# EAGLE board Fejlesztokeszlet1 (EAGLE 6.1)
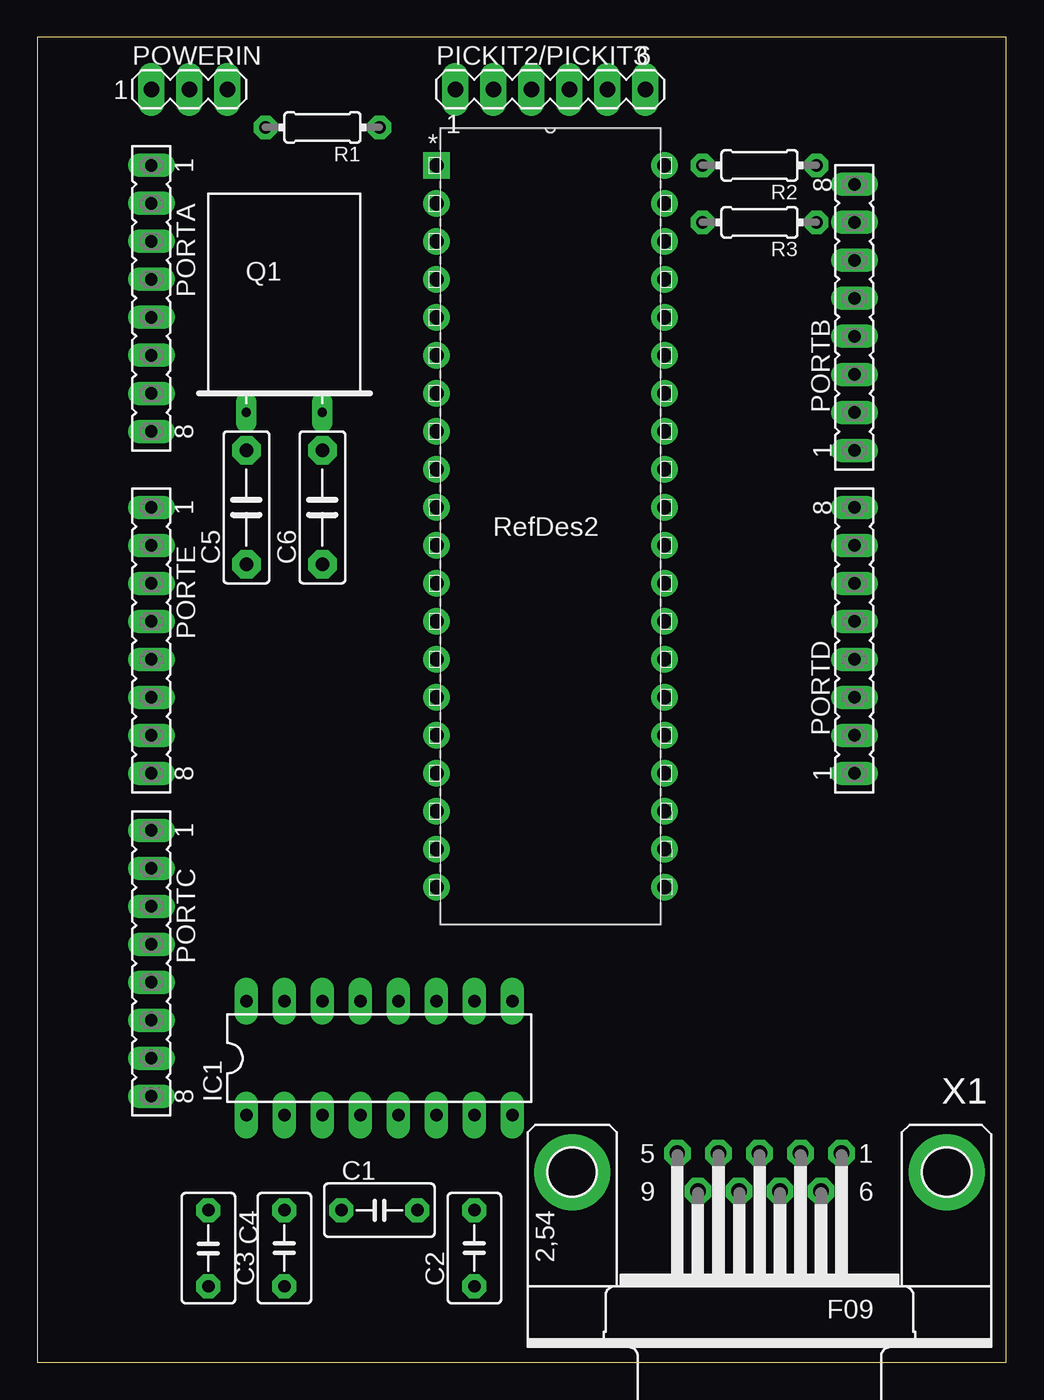
[diagram p0: board, top side]
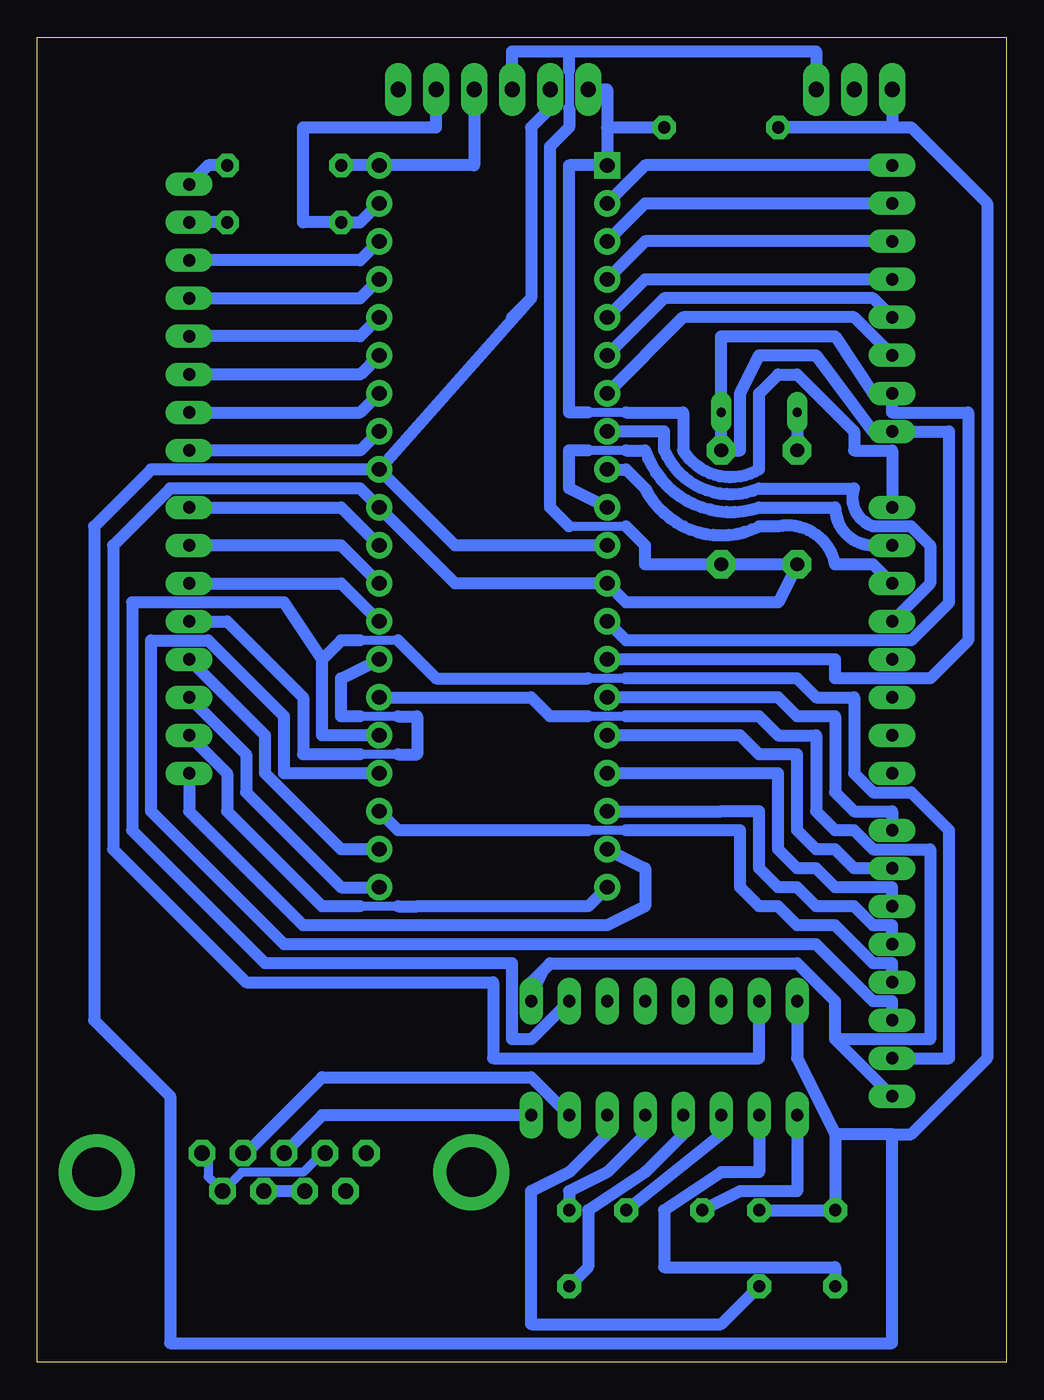
[diagram p1: board, bottom side, seen from below]

Size 64.75 x 88.57 mm. Coordinates in mm from the lower left corner, seen from the top.
Outline: 0,0 64.75,0 64.75,88.57 0,88.57 0,0
Copper layers (1*16): Top 0.035mm / dielectric 1.5mm / Bottom 0.035mm
Design rules: minimum track width 10mil, minimum drill 20mil, track to track 5mil, track to pad 5mil, pad to pad 5mil, via to via 5mil, smd to smd 10mil, copper to edge 20mil, drill to drill 0.5mil, minimum pad ring 15mil, minimum via ring 10mil, stop-mask expansion 0mil, vias tented up to drill 0mil, thermal gap 10mil

## Footprints (pad centres in the part's own frame; a part is rotated, then mirrored left to right if it is on the bottom)
C5B3.5 = drill 0.813 pad 1.6 octagon: 1 -2.54,0; 2 2.54,0
C7.5B3 = drill 0.914 pad 1.905 octagon: 1 -3.81,0; 2 3.81,0
DIL16 = drill 0.813 long: 1 -8.89,-3.81; 2 -6.35,-3.81; 3 -3.81,-3.81; 4 -1.27,-3.81; 5 1.27,-3.81; 6 3.81,-3.81; 7 6.35,-3.81; 8 8.89,-3.81; 9 8.89,3.81; 10 6.35,3.81; 11 3.81,3.81; 12 1.27,3.81; 13 -1.27,3.81; 14 -3.81,3.81; 15 -6.35,3.81; 16 -8.89,3.81
PDIP40_600MC = drill 0.991 square: 1 -15.24,48.26 | drill 0.991: 2 -15.24,45.72; 3 -15.24,43.18; 4 -15.24,40.64; 5 -15.24,38.1; 6 -15.24,35.56; 7 -15.24,33.02; 8 -15.24,30.48; 9 -15.24,27.94; 10 -15.24,25.4; 11 -15.24,22.86; 12 -15.24,20.32; 13 -15.24,17.78; 14 -15.24,15.24; 15 -15.24,12.7; 16 -15.24,10.16; 17 -15.24,7.62; 18 -15.24,5.08; 19 -15.24,2.54; 20 -15.24,0; 21 0,0; 22 0,2.54; 23 0,5.08; 24 0,7.62; 25 0,10.16; 26 0,12.7; 27 0,15.24; 28 0,17.78; 29 0,20.32; 30 0,22.86; 31 0,25.4; 32 0,27.94; 33 0,30.48; 34 0,33.02; 35 0,35.56; 36 0,38.1; 37 0,40.64; 38 0,43.18; 39 0,45.72; 40 0,48.26
MA06-1 = drill 1.016 long: 1 -6.35,0; 2 -3.81,0; 3 -1.27,0; 4 1.27,0; 5 3.81,0; 6 6.35,0
FE08 = drill 0.813 long: 1 -8.89,0; 2 -6.35,0; 3 -3.81,0; 4 -1.27,0; 5 1.27,0; 6 3.81,0; 7 6.35,0; 8 8.89,0
MA03-1 = drill 1.016 long: 1 -2.54,0; 2 0,0; 3 2.54,0
Q = drill 0.61 long: 1 -2.54,-7.62; 2 2.54,-7.62
0204/7 = drill 0.813 octagon: 1 -3.81,0; 2 3.81,0
F09HP = drill 1.016 octagon: 1 -5.486,-1.27; 2 -2.743,-1.27; 3 0,-1.27; 4 2.743,-1.27; 5 5.486,-1.27; 6 -4.115,1.27; 7 -1.372,1.27; 8 1.372,1.27; 9 4.115,1.27 | drill 3.302 pad 5.08: G1 -12.522,0; G2 12.522,0

## Placement (x,y rotation side)
C1  10uF  [C5B3.5]  22.86,10.16 0 top
C2  10uF  [C5B3.5]  29.21,7.62 90 top
C3  10uF  [C5B3.5]  16.51,7.62 90 top
C4  10uF  [C5B3.5]  11.43,7.62 270 top
C5  22pf  [C7.5B3]  13.97,57.15 90 top
C6  22pf  [C7.5B3]  19.05,57.15 90 top
IC1  MAX232  [DIL16]  22.86,20.32 0 top
PIC16F887  PIC16F887-X/P  [PDIP40_600MC]  41.91,31.75 0 top
PICKIT2/PICKIT3  [MA06-1]  34.29,85.09 0 top
PORTA  [FE08]  7.62,71.12 270 top
PORTB  [FE08]  54.61,69.85 90 top
PORTC  [FE08]  7.62,26.67 270 top
PORTD  [FE08]  54.61,48.26 90 top
PORTE  [FE08]  7.62,48.26 270 top
POWERIN  [MA03-1]  10.16,85.09 0 top
Q1  16Mhz  [Q]  16.51,71.12 0 top
R1  4k7  [0204/7]  19.05,82.55 180 top
R2  4k7  [0204/7]  48.26,80.01 180 top
R3  4k7  [0204/7]  48.26,76.2 180 top
X1  [F09HP]  48.26,12.7 180 top

## Library data of the parts
C1-C6 = capacitor-wima
IC1 = maxim; MF: MAXIM; MPN: MAX232ACPE+; OC_FARNELL: 9723773; OC_NEWARK: 68K4544
PIC16F887 = PIC16F887
PICKIT2/PICKIT3 POWERIN = con-lstb; OC_FARNELL: unknown; OC_NEWARK: unknown
PORTA PORTB PORTC PORTD PORTE = con-lsta; OC_FARNELL: unknown; OC_NEWARK: unknown
Q1 = special
R1-R3 = resistor
X1 = con-subd; OC_FARNELL: unknown; OC_NEWARK: unknown

## Nets
GND: X1.5
N$1: PIC16F887.2 PORTA.1
N$2: PIC16F887.3 PORTA.2
N$3: PIC16F887.4 PORTA.3
N$4: PIC16F887.5 PORTA.4
N$5: PIC16F887.6 PORTA.5
N$6: PIC16F887.7 PORTA.6
N$7: C6.2 PIC16F887.13 PIC16F887.14 PORTA.7 PORTA.8 Q1.2
N$9: PIC16F887.20 PORTD.2
N$10: PIC16F887.19 PORTD.1
N$11: PIC16F887.18 PORTC.4
N$12: PIC16F887.17 PORTC.3
N$13: PIC16F887.16 PORTC.2
N$14: PIC16F887.15 PORTC.1
N$15: PIC16F887.21 PORTD.3
N$16: PIC16F887.22 PORTD.4
N$17: PIC16F887.28 PORTD.6
N$18: PIC16F887.27 PORTD.5
N$19: PIC16F887.29 PORTD.7
N$20: PIC16F887.30 PORTD.8
N$21: PIC16F887.23 PORTC.5
N$22: PIC16F887.24 PORTC.6
N$23: IC1.10 PIC16F887.25 PORTC.7
N$24: IC1.9 PIC16F887.26 PORTC.8
N$25: PIC16F887.33 PORTB.1
N$26: PIC16F887.34 PORTB.2
N$27: PIC16F887.35 PORTB.3
N$28: PIC16F887.36 PORTB.4
N$29: PIC16F887.37 PORTB.5
N$30: PIC16F887.38 PORTB.6
N$31: PIC16F887.39 PICKIT2/PICKIT3.5 R3.2
N$32: PIC16F887.40 PICKIT2/PICKIT3.4 R2.2
N$33: PIC16F887.8 PORTE.4
N$34: PIC16F887.9 PORTE.3
N$35: PIC16F887.10 PORTE.2
N$36: PIC16F887.1 PICKIT2/PICKIT3.1 PORTE.1 R1.1
N$37: C5.1 C6.1 IC1.15 PIC16F887.12 PIC16F887.31 PICKIT2/PICKIT3.3 POWERIN.3
N$38: C2.2 IC1.5
N$39: C1.1 IC1.1
N$40: C1.2 IC1.3
N$41: C2.1 IC1.4
N$42: C3.2 C4.1 IC1.16 PIC16F887.11 PIC16F887.32 PICKIT2/PICKIT3.2 POWERIN.1 R1.2
N$43: C3.1 IC1.6
N$44: C4.2 IC1.2
N$45: C5.2 Q1.1
N$46: PORTB.8 R2.1
N$47: X1.1 X1.4 X1.6
N$48: X1.7 X1.8
N$49: IC1.8 X1.3
N$50: IC1.7 X1.2
N$51: PORTB.7 R3.1

## Tracks (layer width: path | path; a pad name or v marks a point on that pad's centre or on a via)
N$1
  Bottom 0.813: PORTA.1 24.13,80.01 PIC16F887.2
N$2
  Bottom 0.813: PIC16F887.3 24.13,77.47 PORTA.2
N$3
  Bottom 0.813: PORTA.3 24.13,74.93 PIC16F887.4
N$4
  Bottom 0.813: PIC16F887.5 24.13,72.39 PORTA.4
N$5
  Bottom 0.813: PIC16F887.6 22.86,71.12 8.89,71.12 PORTA.5
N$6
  Bottom 0.813: PIC16F887.7 21.59,69.85 10.16,69.85 PORTA.6
N$7
  Bottom 0.813: PIC16F887.14 11.43,46.99 11.43,45.72 5.08,45.72 2.54,48.26 2.54,63.5 7.62,63.5 PORTA.7 8.89,64.77 11.43,68.58 19.05,68.58 Q1.2 C6.2 17.78,60.96 17.78,64.77 16.51,67.31 12.7,67.31 8.89,62.23 PORTA.8 3.81,62.23 3.81,50.8 6.35,48.26 25.4,48.26 PIC16F887.13
N$9
  Bottom 0.61: 40.64,30.48 43.18,30.48
  Bottom 0.813: PIC16F887.20 27.94,30.48 39.37,30.48 40.64,30.48 | PORTD.2 52.07,39.37 52.07,36.83 45.72,30.48 43.18,30.48
N$10
  Bottom 0.813: PIC16F887.19 24.13,33.02 24.13,30.48 26.67,29.21 46.99,29.21 54.61,36.83 PORTD.1
N$11
  Bottom 0.813: PORTC.4 7.62,29.21 8.89,29.21 10.16,30.48 12.7,30.48 13.97,31.75 15.24,31.75 16.51,33.02 16.51,36.83 19.05,36.83 PIC16F887.18
N$12
  Bottom 0.813: PORTC.3 7.62,31.75 11.43,31.75 12.7,33.02 13.97,33.02 15.24,34.29 15.24,39.37 PIC16F887.17
N$13
  Bottom 0.406: PIC16F887.16 21.59,41.91
  Bottom 0.813: PIC16F887.16 17.78,41.91 16.51,40.64 13.97,40.64 13.97,35.56 12.7,34.29 11.43,34.29 10.16,33.02 PORTC.2
N$14
  Bottom 0.406: PIC16F887.15 20.32,44.45
  Bottom 0.813: PIC16F887.15 15.24,44.45 13.97,43.18 11.43,43.18 11.43,38.1 10.16,36.83 7.62,36.83 PORTC.1
N$15
  Bottom 0.813: PORTD.3 50.8,40.64 50.8,38.1 44.45,31.75 PIC16F887.21
N$16
  Bottom 0.813: PIC16F887.22 44.45,34.29 49.53,39.37 49.53,41.91 PORTD.4
N$17
  Bottom 0.813: PORTD.6 44.45,52.07 PIC16F887.28
N$18
  Bottom 0.61: 40.64,43.18 43.18,43.18 | 40.64,40.64 43.18,40.64
  Bottom 0.813: PIC16F887.27 44.45,45.72 44.45,43.18 43.18,43.18 | PORTD.5 52.07,49.53 46.99,44.45 46.99,40.64 43.18,40.64 | 40.64,43.18 39.37,43.18 39.37,40.64 40.64,40.64
N$19
  Bottom 0.813: PIC16F887.29 44.45,54.61 PORTD.7
N$20
  Bottom 0.813: PIC16F887.30 43.18,55.88 44.45,57.15 PORTD.8
N$21
  Bottom 0.61: 25.4,35.56 27.94,35.56
  Bottom 0.813: PIC16F887.23 40.64,35.56 27.94,35.56 | PORTC.5 7.62,26.67 8.89,26.67 11.43,29.21 13.97,29.21 15.24,30.48 16.51,30.48 17.78,31.75 17.78,35.56 25.4,35.56
N$22
  Bottom 0.813: PORTC.6 7.62,24.13 8.89,24.13 12.7,27.94 48.26,27.94 57.15,36.83 57.15,48.26 53.34,48.26 48.26,43.18 48.26,39.37 PIC16F887.24
N$23
  Bottom 0.406: 26.67,45.72 25.4,45.72 20.32,45.72
  Bottom 0.61: 40.64,48.26 43.18,48.26 | 25.4,45.72 27.94,45.72
  Bottom 0.813: PORTC.7 3.81,20.32 3.81,35.56 6.35,38.1 8.89,38.1 10.16,39.37 10.16,44.45 12.7,44.45 13.97,45.72 25.4,45.72 | 40.64,48.26 38.1,45.72 27.94,45.72 | 45.72,46.99 44.45,48.26 43.18,48.26 | 45.72,46.99 48.26,50.8 58.42,50.8 58.42,35.56 49.53,26.67 33.02,26.67 33.02,21.59 31.75,21.59 IC1.10 | PIC16F887.25 45.72,41.91 45.72,46.99
N$24
  Bottom 0.406: 30.48,26.67 IC1.9
  Bottom 0.61: 25.4,43.18 27.94,43.18
  Bottom 0.813: PIC16F887.26 31.75,44.45 30.48,43.18 27.94,43.18 | 11.43,21.59 5.08,21.59 5.08,34.29 8.89,34.29 10.16,35.56 11.43,35.56 12.7,36.83 12.7,41.91 15.24,41.91 16.51,43.18 25.4,43.18 | 11.43,21.59 11.43,24.13 13.97,26.67 30.48,26.67 31.75,25.4 IC1.9 | 11.43,21.59 PORTC.8
N$25
  Bottom 0.813: PIC16F887.33 43.18,60.96 PORTB.1
N$26
  Bottom 0.813: PORTB.2 43.18,63.5 PIC16F887.34
N$27
  Bottom 0.813: PIC16F887.35 43.18,66.04 PORTB.3
N$28
  Bottom 0.813: PIC16F887.36 43.18,68.58 PORTB.4
N$29
  Bottom 0.813: PORTB.5 43.18,71.12 PIC16F887.37
N$30
  Bottom 0.813: PIC16F887.38 43.18,73.66 PORTB.6
N$31
  Bottom 0.813: PIC16F887.39 43.18,76.2 R3.2 46.99,76.2 46.99,82.55 38.1,82.55 PICKIT2/PICKIT3.5
N$32
  Bottom 0.406: R2.2 PIC16F887.40 35.56,80.01
  Bottom 0.813: PICKIT2/PICKIT3.4 35.56,80.01 R2.2
N$33
  Bottom 0.813: PORTE.4 5.08,52.07 5.08,54.61 6.35,55.88 8.89,55.88 arc90 10.16,58.42 16.51,58.42 arc90 22.86,60.96 22.86,62.23 PIC16F887.8
N$34
  Bottom 0.813: PORTE.3 8.89,53.34 11.43,53.34 arc-90 15.24,55.88 16.51,55.88 arc90 24.13,58.42 25.4,59.69 PIC16F887.9
N$35
  Bottom 0.61: 25.4,60.96 27.94,60.96
  Bottom 0.813: PIC16F887.10 29.21,58.42 29.21,60.96 27.94,60.96 | PORTE.2 8.89,54.61 arc90 11.43,57.15 16.51,57.15 arc90 24.13,60.96 25.4,60.96
N$36
  Bottom 0.61: 25.4,63.5 27.94,63.5
  Bottom 0.813: PICKIT2/PICKIT3.1 26.67,85.09 26.67,82.55 | 26.67,82.55 PIC16F887.1 29.21,80.01 29.21,63.5 27.94,63.5 | 26.67,82.55 R1.1 | PORTE.1 7.62,60.96 10.16,60.96 10.16,62.23 13.97,66.04 15.24,66.04 16.51,64.77 16.51,59.69 arc90 21.59,60.96 21.59,63.5 25.4,63.5
N$37
  Bottom 0.406: 24.13,53.34 C6.1 C5.1 | 34.29,25.4 46.99,25.4
  Bottom 0.61: 25.4,55.88 29.21,55.88 | 29.21,86.36 29.21,83.82
  Bottom 0.813: 25.4,55.88 24.13,54.61 24.13,53.34 C5.1 15.24,50.8 25.4,50.8 PIC16F887.12 36.83,52.07 PIC16F887.31 43.18,58.42 55.88,58.42 59.69,54.61 59.69,34.29 50.8,25.4 34.29,25.4 34.29,20.32 16.51,20.32 IC1.15 | 29.21,55.88 30.48,57.15 30.48,81.28 29.21,82.55 29.21,83.82 | PICKIT2/PICKIT3.3 33.02,87.63 29.21,87.63 | 29.21,87.63 12.7,87.63 POWERIN.3 | 29.21,86.36 29.21,87.63
N$38
  Bottom 0.813: C2.2 29.21,11.43 26.67,12.7 24.13,15.24 IC1.5
N$39
  Bottom 0.813: IC1.1 13.97,11.43 17.78,11.43 C1.1
N$40
  Bottom 0.813: IC1.3 19.05,15.24 C1.2
N$41
  Bottom 0.813: C2.1 27.94,6.35 27.94,10.16 24.13,12.7 21.59,15.24 IC1.4
N$42
  Bottom 0.406: 7.62,82.55 6.35,82.55
  Bottom 0.813: PIC16F887.11 36.83,54.61 PIC16F887.32 | 7.62,15.24 7.62,1.27 55.88,1.27 55.88,17.78 60.96,22.86 60.96,55.88 57.15,59.69 PIC16F887.32 | 7.62,15.24 11.43,15.24 | 11.43,15.24 C4.1 C3.2 | IC1.16 13.97,20.32 11.43,15.24 | 7.62,15.24 6.35,15.24 1.27,20.32 1.27,77.47 6.35,82.55 R1.2 7.62,82.55 POWERIN.1 | 31.75,71.12 PIC16F887.32 | PICKIT2/PICKIT3.2 30.48,83.82 31.75,82.55 31.75,71.12 | 31.75,71.12 33.02,69.85
N$43
  Bottom 0.813: C3.1 19.05,2.54 31.75,2.54 31.75,11.43 29.21,12.7 26.67,15.24 IC1.6
N$44
  Bottom 0.813: C4.2 11.43,6.35 22.86,6.35 22.86,10.16 19.05,12.7 16.51,12.7 IC1.2
N$45
  Bottom 0.813: Q1.1 C5.2
N$46
  Bottom 0.813: R2.1 53.34,80.01 PORTB.8
N$47
  Bottom 0.254: 45.72,13.97 X1.4 | 53.34,13.97 X1.1 | 52.07,11.43 X1.6
  Bottom 0.61: 45.72,13.97 46.99,12.7 51.11,12.7 X1.6 53.34,12.4 53.34,13.97
N$48
  Bottom 0.254: X1.7 49.53,11.43 | 46.99,11.43 X1.8
  Bottom 0.813: 46.99,11.43 49.53,11.43
N$49
  Bottom 0.813: IC1.8 45.72,16.51 X1.3
N$50
  Bottom 0.254: 50.8,13.97 X1.2
  Bottom 0.813: 50.8,13.97 45.72,19.05 31.75,19.05 IC1.7
N$51
  Bottom 0.813: R3.1 PORTB.7